# Altium PCB Grabber_DIOT.PCBDOC (part 1 of 7)
Units mm, origin at the board's own origin, x right, y up, seen from the top; angles counter-clockwise.
Board outline 221.14 x 100 mm, 4 copper layers (TopLayer, MidLayer1, Internal layer GND, Bottom Layer), stack 1.607 mm thick; 234 components, 170 nets, 1025 pads, 389 vias.
Unrouted connection lines stored in the file: 2.
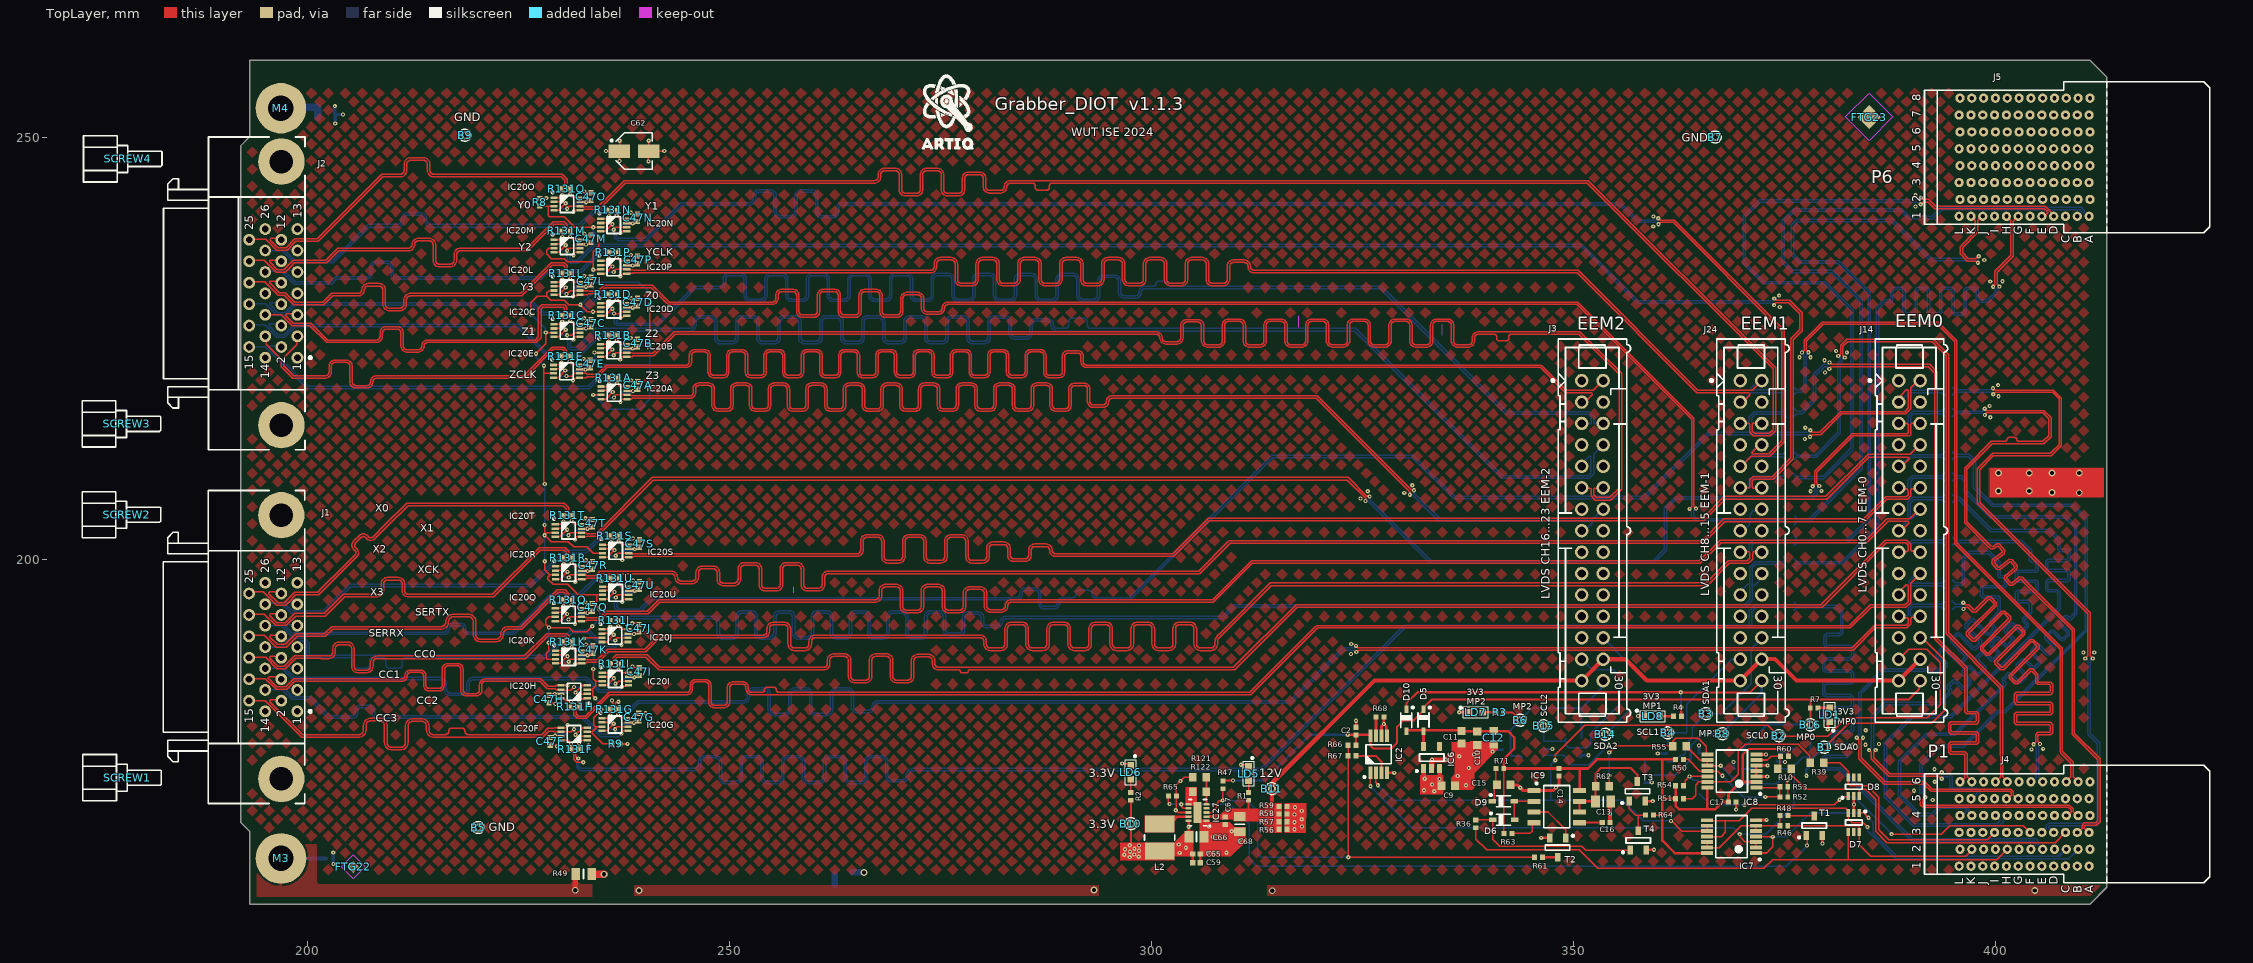
[diagram p0: TopLayer view]
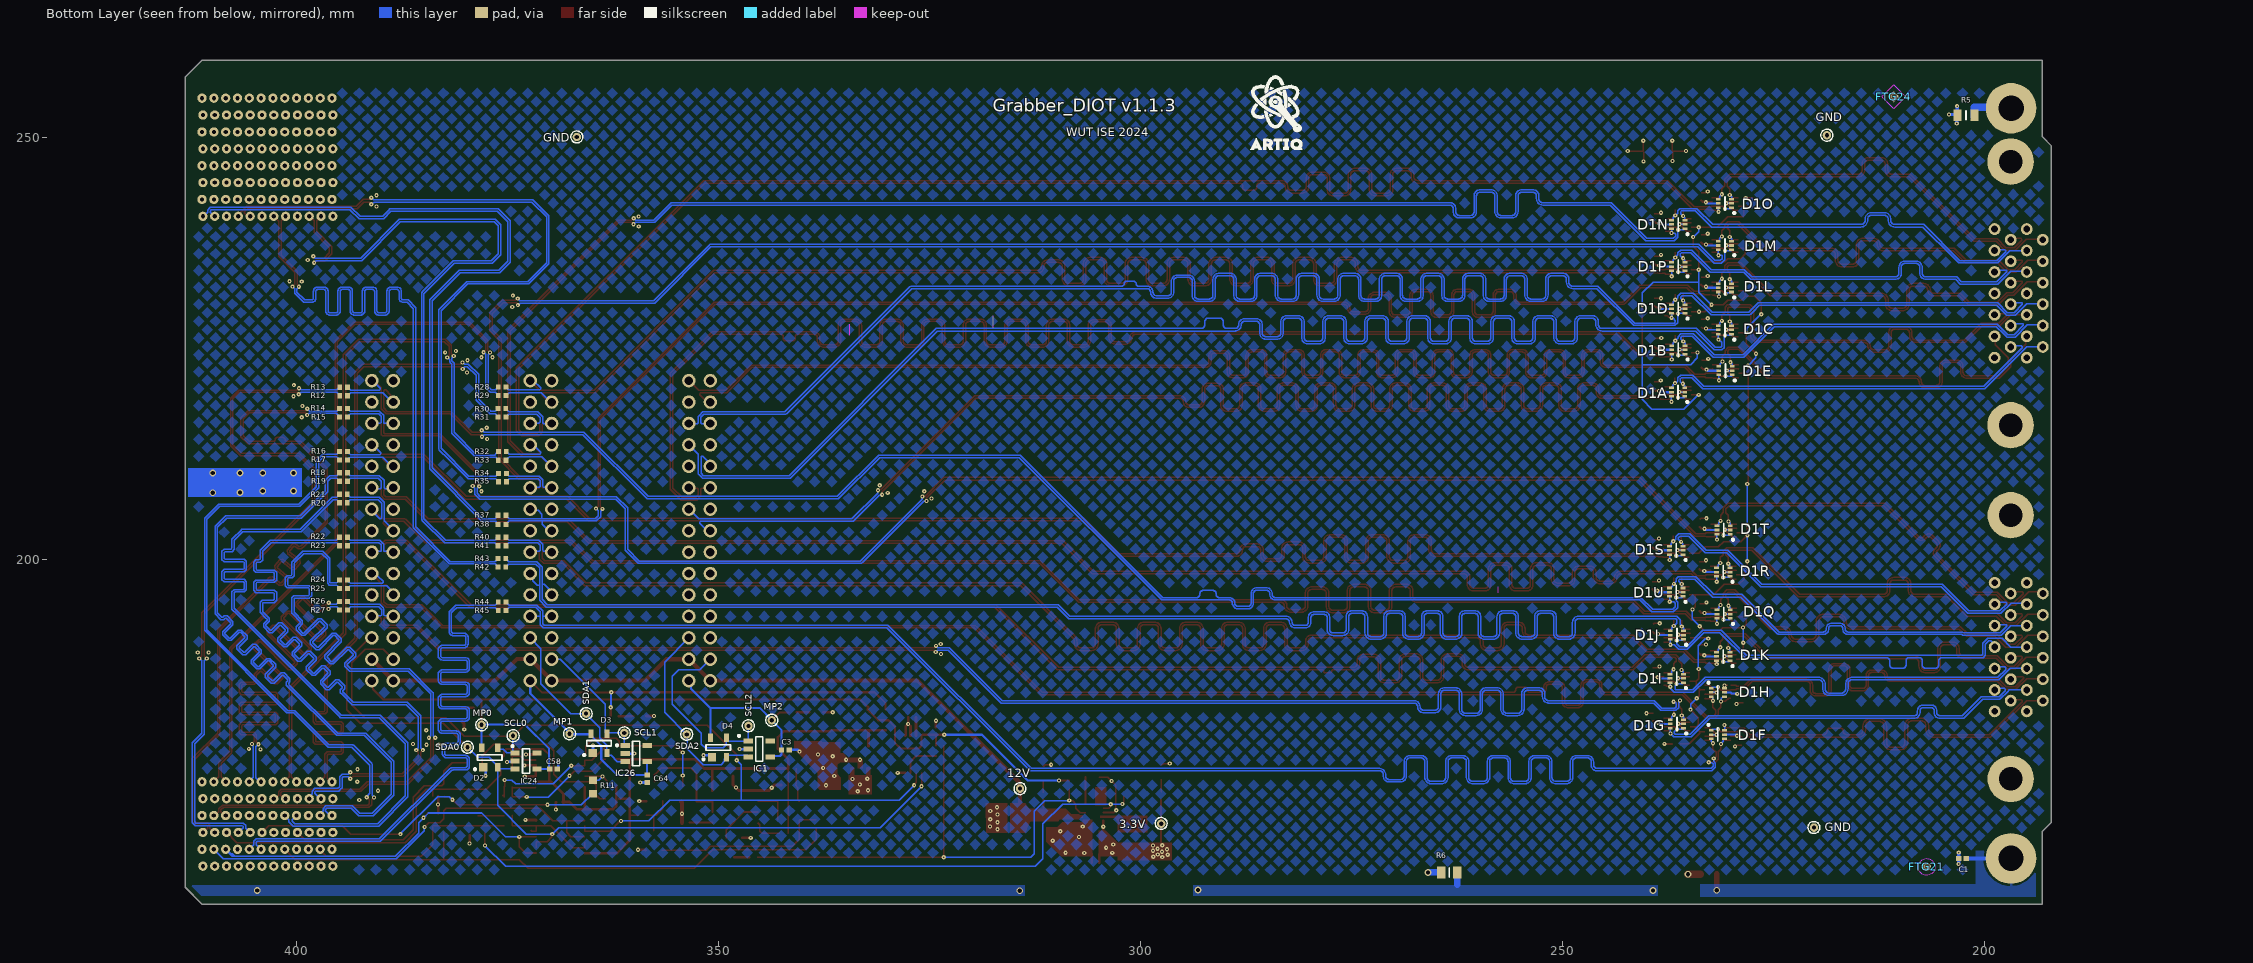
[diagram p1: Bottom Layer view, seen from below]
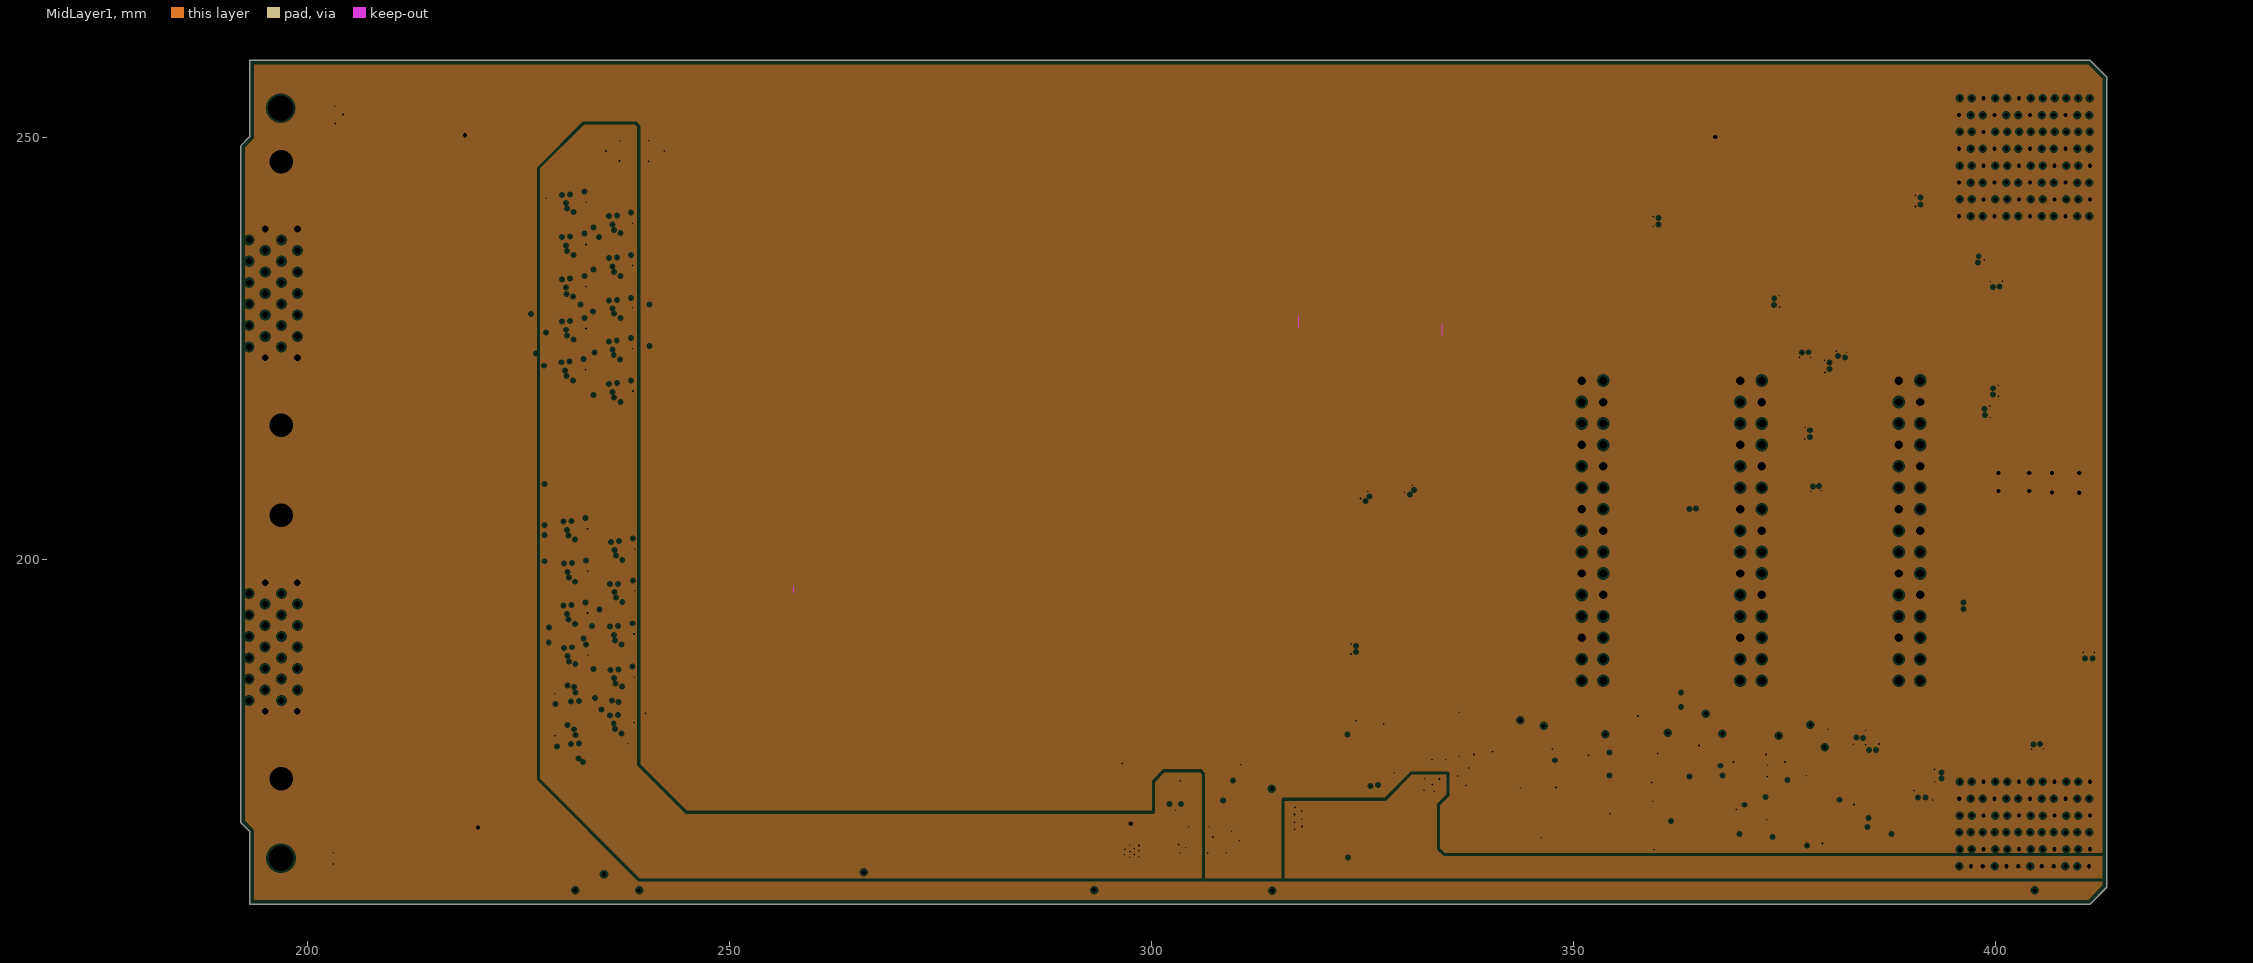
[diagram p2: MidLayer1, clearances drawn from the general rule]
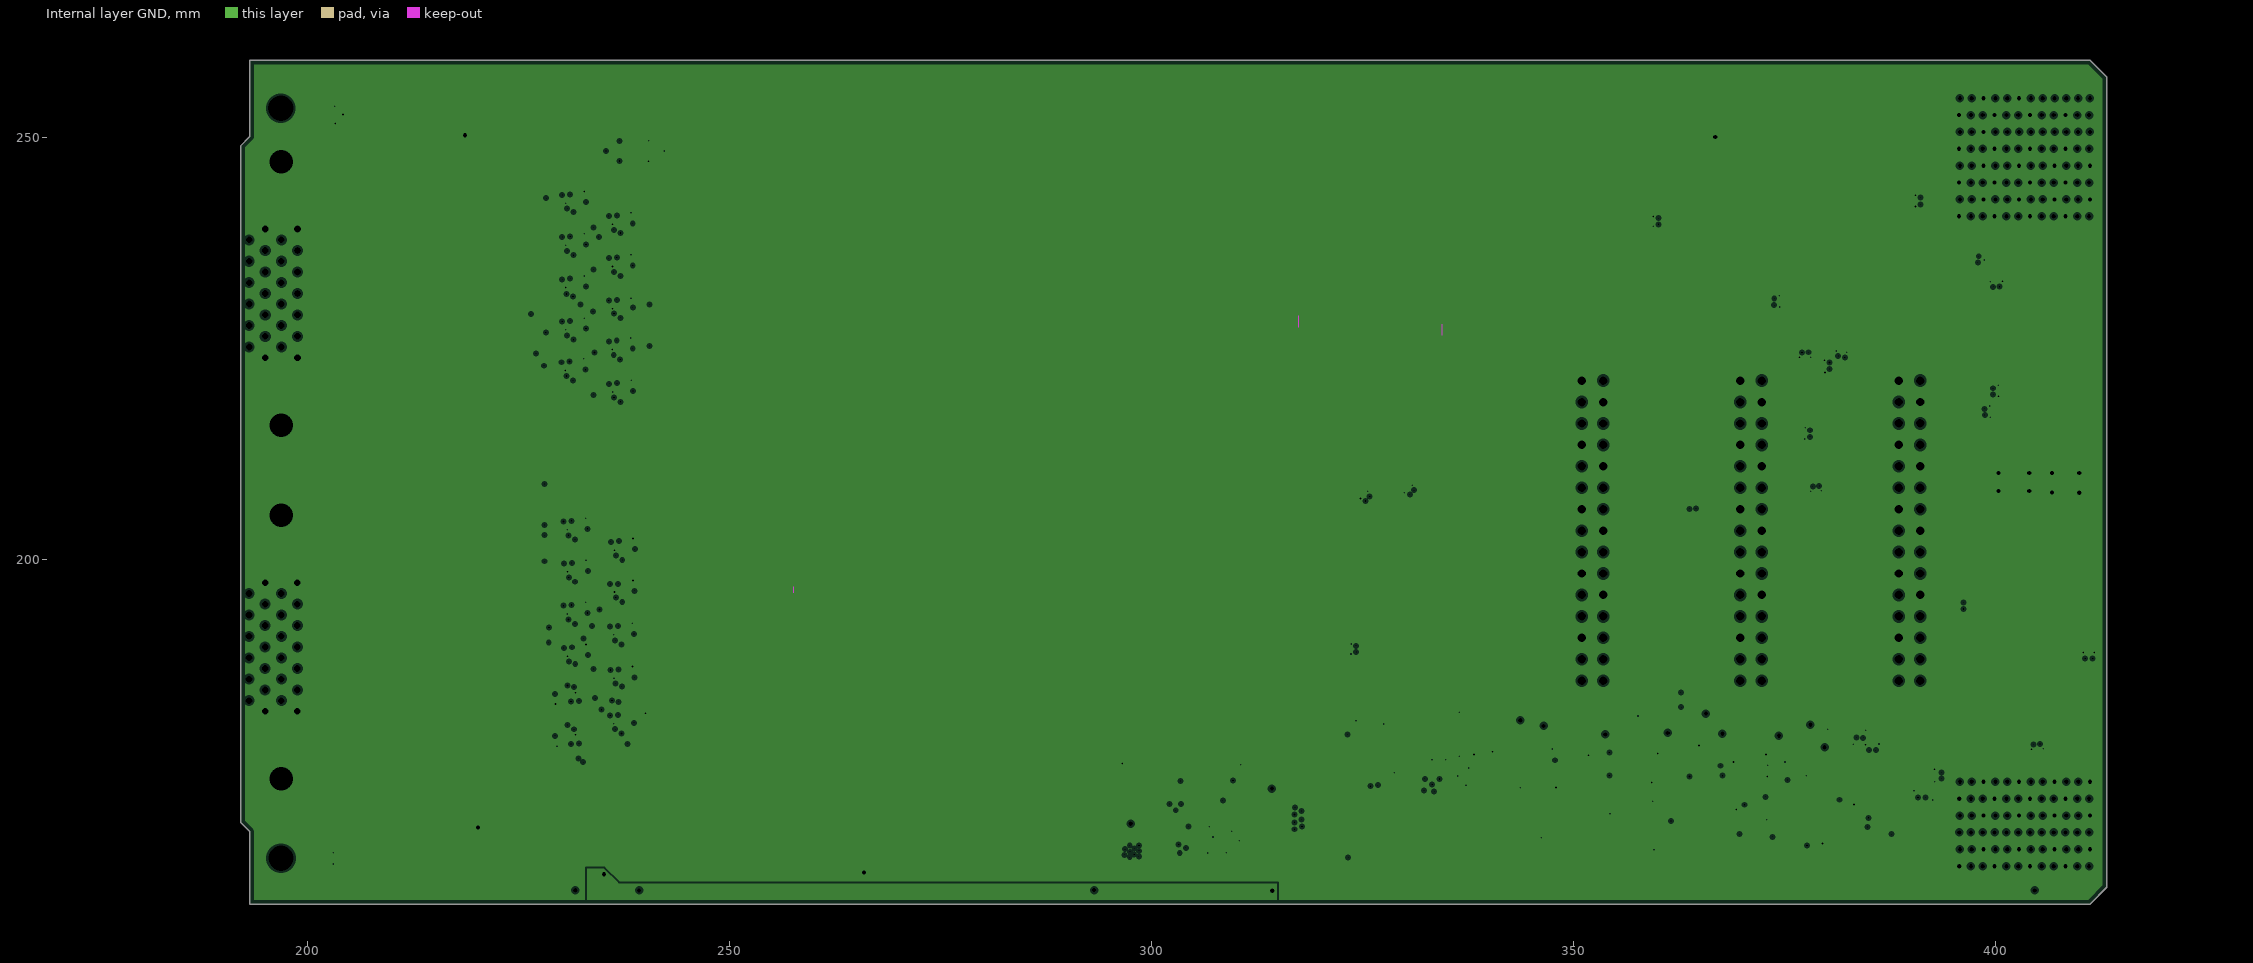
[diagram p3: Internal layer GND, clearances drawn from the general rule]

## Layer stack, top to bottom
TopSolder: solder mask 0.053, Solder Resist, Dk 3.5
TopLayer: signal copper 0.035
Dielectric1: core 0.3768, FR-4, Dk 4.5
MidLayer1: plane copper 0.035, net (Multiple Nets)
Dielectric 2: prepreg 0.713, FR-4, Dk 4.5
Internal layer GND: plane copper 0.035, net (Multiple Nets)
Dielectric 3: core 0.3768, FR-4, Dk 4.5
Bottom Layer: signal copper 0.035
Bottom Solder: solder mask 0.053, Solder Resist, Dk 3.5

## Board outline
192.092,168.856 193.192,167.756 193.192,159.157 411.231,159.156 413.231,161.156 413.231,257.157 411.231,259.156 193.293,259.156 193.192,259.156 193.192,250.107 192.092,249.007

## Design rules (kind name [scope] priority, off if disabled: settings)
AcuteAngle [All] p1: minimum=4.50000000000000E+0001 checktracksonly=FALSE
AssemblyTestPointUsage [All] p1 off:
AssemblyTestpoint [All] p1 off: testpointundercomponent=TRUE minsize=1.016 maxsize=2.54 preferedsize=1.524 minholesize=0 maxholesize=1.016 preferedholesize=0.813 testpointgrid=0.025 usegrid=TRUE gridtolerance=0 allowsidetop=TRUE allowsidebottom=TRUE
BoardOutlineClearance [All] p1: gap=0.4 ignorepadtopadclearanceinfootprint=FALSE
Clearance Clearance_diff_via [IsVia vs IsVia] p1: gap=0.107 ignorepadtopadclearanceinfootprint=FALSE
Clearance Clearance_outer [OnLayer('TopLayer') or OnLayer('Bottom Layer')] p2: gap=0.107 ignorepadtopadclearanceinfootprint=TRUE
Clearance Clearance_inner [(OnLayer('MidLayer1'))] p3: gap=0.107 ignorepadtopadclearanceinfootprint=FALSE
ComponentClearance ComponentClearance_2 [InComponent('SCREW1') or InComponent('SCREW2')or InComponent('SCREW3')or InComponent('SCREW4')] p1: gap=0 collisioncheckmode=3 verticalgap=2540 showdistances=FALSE
ComponentClearance ComponentClearance_1 [(Identifier = 'us251F809CB7zw3h')] p2: gap=0 collisioncheckmode=3 verticalgap=2540 showdistances=FALSE
ComponentClearance [All] p3: gap=0.254 collisioncheckmode=3 verticalgap=0.254 showdistances=FALSE
DiffPairsRouting DiffPairsRouting_100_Ohm [InDifferentialPairClass('All Differential Pairs')] p1: maxlimit=0.254 minlimit=0.127 mostfreqgap=0.152 toplayer_minwidth=0.127 toplayer_maxwidth=0.152 toplayer_prefwidth=0.152 bottomlayer_minwidth=0.127 bottomlayer_maxwidth=0.152 bottomlayer_prefwidth=0.152 maxuncoupledlength=14.732
FabricationTestPointUsage TestPointUsage [All] p1: valid=0 allowmultiple=FALSE
FabricationTestpoint Testpoint [All] p1: side=3 testpointundercomponent=TRUE minsize=1.016 maxsize=2.54 preferedsize=1.524 minholesize=0.508 maxholesize=1.016 preferedholesize=0.813 testpointgrid=0.025 allowsidetop=TRUE allowsidebottom=TRUE usegrid=TRUE gridtolerance=0
Height Height_1 [OnLayer('BottomLayer')] p1: minheight=0 maxheight=2 prefheight=1
Height [All] p2: minheight=0 maxheight=25.4 prefheight=12.7
HoleSize [All] p1: absolutevalues=TRUE maxlimit=3.2 minlimit=0.15 maxpercent=80.000 minpercent=20.000
HoleToHoleClearance [All] p1: gap=0.15 allowstackedmicrovias=TRUE
MatchedLengths MatchedLengths_xSignals_CL1 [InxSignalClass('CL_LVDS')] p1: tolerance=25.4 checknetsindiffpair=FALSE checkdiffpairvsdiffpair=TRUE checkxsignals=TRUE checkothers=TRUE usedelayunits=TRUE delaytolerance=10.000000
MatchedLengths MatchedLengths_xSignals_BP1 [InxSignalClass('BP_LVDS')] p2: tolerance=25.4 checknetsindiffpair=FALSE checkdiffpairvsdiffpair=TRUE checkxsignals=TRUE checkothers=TRUE usedelayunits=TRUE delaytolerance=10.000000
MatchedLengths MatchedLengths_xSignals_EEM1 [InxSignalClass('EEM_LVDS')] p3: tolerance=25.4 checknetsindiffpair=FALSE checkdiffpairvsdiffpair=TRUE checkxsignals=TRUE checkothers=TRUE usedelayunits=TRUE delaytolerance=10.000000
MatchedLengths MatchedLengths_xSignals2_CL2 [InxSignalClass('CL_LVDS')] p4: tolerance=25.4 checknetsindiffpair=TRUE checkdiffpairvsdiffpair=FALSE checkxsignals=FALSE checkothers=FALSE usedelayunits=TRUE delaytolerance=5.000000
MatchedLengths MatchedLengths_xSignals2_BP2 [InxSignalClass('BP_LVDS')] p5: tolerance=25.4 checknetsindiffpair=TRUE checkdiffpairvsdiffpair=FALSE checkxsignals=FALSE checkothers=FALSE usedelayunits=TRUE delaytolerance=5.000000
MatchedLengths MatchedLengths_xSignals2_EEM2 [InxSignalClass('EEM_LVDS')] p6: tolerance=25.4 checknetsindiffpair=TRUE checkdiffpairvsdiffpair=FALSE checkxsignals=FALSE checkothers=FALSE usedelayunits=TRUE delaytolerance=5.000000
MinimumSolderMaskSliver [All] p1: minsoldermaskwidth=0.1
ParallelSegment [All] p1 off: limit=5 gap=0.254
PlaneClearance [All] p1: clearance=0.254
PlaneConnect PlaneConnect_1 [HasCompParameterValue('PressFit', 'Yes')] p1: planeconnectstyle=Direct reliefexpansion=0.2 reliefentries=4 reliefconductorwidth=0.254 reliefairgap=0.254
PlaneConnect [All] p2: pad.planeconnectstyle=Relief pad.reliefexpansion=0.2 pad.reliefentries=4 pad.reliefconductorwidth=0.254 pad.reliefairgap=0.254 via.planeconnectstyle=Direct via.reliefexpansion=0.2 via.reliefentries=4 via.reliefconductorwidth=0.254 via.reliefairgap=0.15
PolygonConnect PolygonConnect_3 [HasFootprint('AMPHENOL_10052825-101LF')] p1: thpad.connectstyle=Direct thpad.reliefconductorwidth=0.254 thpad.reliefentries=4 thpad.polygonreliefangle="90 Angle" thpad.airgapwidth=0.254 smdpad.connectstyle=Relief smdpad.reliefconductorwidth=0.254 smdpad.reliefentries=4 smdpad.polygonreliefangle="90 Angle" smdpad.airgapwidth=0.254 via.connectstyle=Relief via.reliefconductorwidth=0.254 via.reliefentries=4 via.polygonreliefangle="90 Angle" via.airgapwidth=0.254
PolygonConnect PolygonConnect_1 [InPolygonClass('Direct')] p2: connectstyle=Direct reliefconductorwidth=0.254 reliefentries=2 polygonreliefangle="45 Angle" airgapwidth=0.254
PolygonConnect PolygonConnect_2 [InNetClass('PWR')] p3: thpad.connectstyle=Relief thpad.reliefconductorwidth=0.5 thpad.reliefentries=4 thpad.polygonreliefangle="90 Angle" thpad.airgapwidth=0.254 smdpad.connectstyle=Relief smdpad.reliefconductorwidth=0.5 smdpad.reliefentries=4 smdpad.polygonreliefangle="90 Angle" smdpad.airgapwidth=0.25 via.connectstyle=Direct via.reliefconductorwidth=0.254 via.reliefentries=2 via.polygonreliefangle="90 Angle" via.airgapwidth=0.254
PolygonConnect [All] p4: thpad.connectstyle=Relief thpad.reliefconductorwidth=0.254 thpad.reliefentries=4 thpad.polygonreliefangle="90 Angle" thpad.airgapwidth=0.254 smdpad.connectstyle=Relief smdpad.reliefconductorwidth=0.254 smdpad.reliefentries=4 smdpad.polygonreliefangle="90 Angle" smdpad.airgapwidth=0.254 via.connectstyle=Direct via.reliefconductorwidth=0.254 via.reliefentries=4 via.polygonreliefangle="90 Angle" via.airgapwidth=0.254
RoutingLayers RoutingLayers_1 [InAnyDifferentialPair] p1: top layer_v5=TRUE bottom layer_v5=TRUE
RoutingLayers RoutingLayers_2 [InNetClass('50Ohm')] p2: top layer_v5=TRUE bottom layer_v5=TRUE
RoutingLayers [All] p3: top layer_v5=TRUE bottom layer_v5=TRUE
RoutingVias [All] p1: holewidth=0.2 width=0.5 viastyle="Through Hole" minholewidth=0.2 minwidth=0.5 maxholewidth=0.508 maxwidth=1.016
SMDEntry [All] p1 off: side=TRUE corner=TRUE anyangle=FALSE
SilkToSilkClearance [All] p1: silktosilkclearance=0.15
SilkToSolderMaskClearance SilkscreenOverComponentPads [IsPad] p1: minsilkscreentomaskgap=0.025 clearancetoexposedcopper=FALSE
SolderMaskExpansion SolderMaskExpansion_1 [IsVia] p1: expansion=0.05 istentingtop=TRUE
SolderMaskExpansion [All] p2: expansion=0.05 istentingtop=FALSE
StubLength [All] p1: limit=3
SupplyNets "Schematic Supply Nets_9" [InNet('P3V3_CPCIS')] p1: voltage=0.000
SupplyNets "Schematic Supply Nets_8" [InNet('STRIP1')] p2: voltage=0.000
SupplyNets "Schematic Supply Nets_7" [InNet('P12V0_CPCIS')] p3: voltage=0.000
SupplyNets "Schematic Supply Nets_6" [InNet('GND')] p4: voltage=0.000
SupplyNets "Schematic Supply Nets_5" [InNet('P3V3_MP0')] p5: voltage=0.000
SupplyNets "Schematic Supply Nets_4" [InNet('P3V3')] p6: voltage=0.000
SupplyNets "Schematic Supply Nets_3" [InNet('P3V3_MP1')] p7: voltage=0.000
SupplyNets "Schematic Supply Nets_1" [InNet('P12V0')] p8: voltage=0.000
SupplyNets "Schematic Supply Nets" [InNet('P3V3_MP2')] p9: voltage=0.000
UnConnectedPin [All] p1 off:
UnRoutedNet UnRoutedNet_1 [Not InNet('STRIP1')] p2:
UnpouredPolygon UnpouredPolygon_1 [InPolygonClass('Copper_Balancing')] p1: allowunpoured=TRUE
UnpouredPolygon [All] p2:
ViasUnderSMD [All] p1: allowed=TRUE
Width Width_pwr [InNetClass('PWR')] p1: maxlimit=2 minlimit=0.152 preferedwidth=0.3 minimp=50.000000 maximp=50.000000 favimp=50.000000
Width Width_50Ohm [InNetClass('50Ohm')] p2: maxlimit=0.167 minlimit=0.167 preferedwidth=0.167 minimp=50.000000 maximp=50.000000 favimp=50.000000
Width [All] p3: maxlimit=2 minlimit=0.152 preferedwidth=0.152 minimp=50.000000 maximp=50.000000 favimp=50.000000
14 further rules are at their usual default settings.

## Classes and differential pairs
component class U_Supply: C2 C9 C10 C11 C59 C62 C65 C66 C67 C68 D5 D10 IC2 IC6 IC27 L2 R47 R56 R57 R58 R59 R65 R66 R67 R68 R121 R122
net class ESD_STRIP: STRIP1 STRIP2 STRIP3
component class Grabber_DIOT_TOP: C1 M3 M4 R5 R6 R49
net class BP_LVDS: BP_IO.LVDS_N0 BP_IO.LVDS_N1 BP_IO.LVDS_N2 BP_IO.LVDS_N3 BP_IO.LVDS_N4 BP_IO.LVDS_N5 BP_IO.LVDS_N6 BP_IO.LVDS_N7 BP_IO.LVDS_N8 BP_IO.LVDS_N9 BP_IO.LVDS_N10 BP_IO.LVDS_N11 BP_IO.LVDS_N12 BP_IO.LVDS_N13 BP_IO.LVDS_N14 BP_IO.LVDS_N15 BP_IO.LVDS_P0 BP_IO.LVDS_P1 BP_IO.LVDS_P2 BP_IO.LVDS_P3 BP_IO.LVDS_P4 BP_IO.LVDS_P5 BP_IO.LVDS_P6 BP_IO.LVDS_P7 BP_IO.LVDS_P8 BP_IO.LVDS_P9 BP_IO.LVDS_P10 BP_IO.LVDS_P11 BP_IO.LVDS_P12 BP_IO.LVDS_P13 BP_IO.LVDS_P14 BP_IO.LVDS_P15
differential pair class Diff_100Ohm: BP_IO.LVDS0 BP_IO.LVDS1 BP_IO.LVDS2 BP_IO.LVDS3 BP_IO.LVDS4 BP_IO.LVDS5 BP_IO.LVDS6 BP_IO.LVDS7 BP_IO.LVDS8 BP_IO.LVDS9 BP_IO.LVDS10 BP_IO.LVDS11 BP_IO.LVDS12 BP_IO.LVDS13 BP_IO.LVDS14 BP_IO.LVDS15 EEM_IO.LVDS0 EEM_IO.LVDS1 EEM_IO.LVDS2 EEM_IO.LVDS3 EEM_IO.LVDS4 EEM_IO.LVDS5 EEM_IO.LVDS6 EEM_IO.LVDS7 EEM_IO.LVDS8 EEM_IO.LVDS9 EEM_IO.LVDS10 EEM_IO.LVDS11 EEM_IO.LVDS12 EEM_IO.LVDS13 EEM_IO.LVDS14 EEM_IO.LVDS15 EEM_IO.LVDS16 EEM_IO.LVDS17 EEM_IO.LVDS18 EEM_IO.LVDS19 EEM_IO.LVDS20
net class PWR: P12V0_CPCIS
net class EEM_IO.LVDS_P[0..20]: EEM_IO.LVDS_P0 EEM_IO.LVDS_P1 EEM_IO.LVDS_P2 EEM_IO.LVDS_P3 EEM_IO.LVDS_P4 EEM_IO.LVDS_P5 EEM_IO.LVDS_P6 EEM_IO.LVDS_P7 EEM_IO.LVDS_P8 EEM_IO.LVDS_P9 EEM_IO.LVDS_P10 EEM_IO.LVDS_P11 EEM_IO.LVDS_P12 EEM_IO.LVDS_P13 EEM_IO.LVDS_P14 EEM_IO.LVDS_P15 EEM_IO.LVDS_P16 EEM_IO.LVDS_P17 EEM_IO.LVDS_P18 EEM_IO.LVDS_P19 EEM_IO.LVDS_P20
net class EEM_IO.LVDS_N[0..20]: EEM_IO.LVDS_N0 EEM_IO.LVDS_N1 EEM_IO.LVDS_N2 EEM_IO.LVDS_N3 EEM_IO.LVDS_N4 EEM_IO.LVDS_N5 EEM_IO.LVDS_N6 EEM_IO.LVDS_N7 EEM_IO.LVDS_N8 EEM_IO.LVDS_N9 EEM_IO.LVDS_N10 EEM_IO.LVDS_N11 EEM_IO.LVDS_N12 EEM_IO.LVDS_N13 EEM_IO.LVDS_N14 EEM_IO.LVDS_N15 EEM_IO.LVDS_N16 EEM_IO.LVDS_N17 EEM_IO.LVDS_N18 EEM_IO.LVDS_N19 EEM_IO.LVDS_N20
net class BP_IO.LVDS_P[0..15]: BP_IO.LVDS_P0 BP_IO.LVDS_P1 BP_IO.LVDS_P2 BP_IO.LVDS_P3 BP_IO.LVDS_P4 BP_IO.LVDS_P5 BP_IO.LVDS_P6 BP_IO.LVDS_P7 BP_IO.LVDS_P8 BP_IO.LVDS_P9 BP_IO.LVDS_P10 BP_IO.LVDS_P11 BP_IO.LVDS_P12 BP_IO.LVDS_P13 BP_IO.LVDS_P14 BP_IO.LVDS_P15
net class BP_IO.LVDS_N[0..15]: BP_IO.LVDS_N0 BP_IO.LVDS_N1 BP_IO.LVDS_N2 BP_IO.LVDS_N3 BP_IO.LVDS_N4 BP_IO.LVDS_N5 BP_IO.LVDS_N6 BP_IO.LVDS_N7 BP_IO.LVDS_N8 BP_IO.LVDS_N9 BP_IO.LVDS_N10 BP_IO.LVDS_N11 BP_IO.LVDS_N12 BP_IO.LVDS_N13 BP_IO.LVDS_N14 BP_IO.LVDS_N15
component class U_EEM_Connectors: C12 IC7 J3 J14 J24 R12 R13 R14 R15 R16 R17 R18 R19 R20 R21 R22 R23 R24 R25 R26 R27 R28 R29 R30 R31 R32 R33 R34 R35 R37 R38 R40 R41 R42 R43 R44 R45
component class U_CPCIS_Connectors: C13 C14 C15 C16 C17 D6 D7 D8 D9 IC8 IC9 J4 J5 P1 R10 R11 R36 R39 R46 R48 R50 R51 R52 R53 R54 R55 R60 R61 R62 R63 R64 R71 T1 T2 T3 T4
net class EEM_LVDS: EEM_IO.LVDS_N0 EEM_IO.LVDS_N1 EEM_IO.LVDS_N2 EEM_IO.LVDS_N3 EEM_IO.LVDS_N4 EEM_IO.LVDS_N5 EEM_IO.LVDS_N6 EEM_IO.LVDS_N7 EEM_IO.LVDS_N8 EEM_IO.LVDS_N9 EEM_IO.LVDS_N10 EEM_IO.LVDS_N11 EEM_IO.LVDS_N12 EEM_IO.LVDS_N13 EEM_IO.LVDS_N14 EEM_IO.LVDS_N15 EEM_IO.LVDS_N16 EEM_IO.LVDS_N17 EEM_IO.LVDS_N18 EEM_IO.LVDS_N19 EEM_IO.LVDS_N20 EEM_IO.LVDS_P0 EEM_IO.LVDS_P1 EEM_IO.LVDS_P2 EEM_IO.LVDS_P3 EEM_IO.LVDS_P4 EEM_IO.LVDS_P5 EEM_IO.LVDS_P6 EEM_IO.LVDS_P7 EEM_IO.LVDS_P8 EEM_IO.LVDS_P9 EEM_IO.LVDS_P10 EEM_IO.LVDS_P11 EEM_IO.LVDS_P12 EEM_IO.LVDS_P13 EEM_IO.LVDS_P14 EEM_IO.LVDS_P15 EEM_IO.LVDS_P16 EEM_IO.LVDS_P17 EEM_IO.LVDS_P18 EEM_IO.LVDS_P19 EEM_IO.LVDS_P20
net class CL_LVDS: CC0_N CC0_P CC1_N CC1_P CC2_N CC2_P CC3_N CC3_P SerRX_N SerRX_P SerTX_N SerTX_P X0_N X0_P X1_N X1_P X2_N X2_P X3_N X3_P XCLK_N XCLK_P Y0_N Y0_P Y1_N Y1_P Y2_N Y2_P Y3_N Y3_P YCLK_N YCLK_P Z0_N Z0_P Z1_N Z1_P Z2_N Z2_P Z3_N Z3_P ZCLK_N ZCLK_P
component class U_LVDS_repeater2: C47B D1B IC20B R131B
component class U_LVDS_repeater21: C47U D1U IC20U R131U
component class U_LVDS_repeater20: C47T D1T IC20T R131T
component class U_LVDS_repeater19: C47S D1S IC20S R131S
component class U_LVDS_repeater18: C47R D1R IC20R R131R
component class U_LVDS_repeater17: C47Q D1Q IC20Q R131Q
channel class LVDS_repeater: U_LVDS_repeater1 U_LVDS_repeater2 U_LVDS_repeater3 U_LVDS_repeater4 U_LVDS_repeater5 U_LVDS_repeater6 U_LVDS_repeater7 U_LVDS_repeater8 U_LVDS_repeater9 U_LVDS_repeater10 U_LVDS_repeater11 U_LVDS_repeater12 U_LVDS_repeater13 U_LVDS_repeater14 U_LVDS_repeater15 U_LVDS_repeater16 U_LVDS_repeater17 U_LVDS_repeater18 U_LVDS_repeater19 U_LVDS_repeater20 U_LVDS_repeater21
component class U_LVDS_repeater10: C46J C47J D1J IC19J IC20J R131J R132J R133J T25J
component class U_LVDS_repeater9: C46I C47I D1I IC19I IC20I R131I R132I R133I T25I
component class U_LVDS_repeater8: C46H C47H D1H IC19H IC20H R131H R132H R133H T25H
component class U_LVDS_repeater6: C46F C47F D1F IC19F IC20F R131F R132F R133F T25F
component class U_LVDS_repeater5: C46E C47E D1E IC19E IC20E R131E R132E R133E T25E
component class U_LVDS_repeater4: C46D C47D D1D IC19D IC20D R131D R132D R133D T25D
component class U_LVDS_repeater3: C47C D1C IC20C R131C
component class U_LVDS_repeater7: C47G D1G IC20G R131G
component class U_LVDS_repeater1: C47A D1A IC20A R131A
component class U_Grabber_DIOT: B1 B2 B3 B4 B5 B6 B7 B8 B9 B10 B11 B14 B15 B16 C3 C58 C64 D2 D3 D4 FTG21 FTG22 FTG23 FTG24 IC1 IC24 IC26 J1 J2 LD1 LD5 LD6 LD7 LD8 R1 R2 R3 R4 R7 R8 R9 SCREW1 SCREW2 SCREW3 SCREW4
component class U_LVDS_repeater11: C47K D1K IC20K R131K
component class U_LVDS_repeater12: C47L D1L IC20L R131L
component class U_LVDS_repeater13: C47M D1M IC20M R131M
component class U_LVDS_repeater14: C47N D1N IC20N R131N
component class U_LVDS_repeater15: C47O D1O IC20O R131O
component class U_LVDS_repeater16: C47P D1P IC20P R131P
differential pair EEM_IO.LVDS20: +EEM_IO.LVDS_P20 -EEM_IO.LVDS_N20
differential pair EEM_IO.LVDS19: +EEM_IO.LVDS_P19 -EEM_IO.LVDS_N19
differential pair EEM_IO.LVDS18: +EEM_IO.LVDS_P18 -EEM_IO.LVDS_N18
differential pair EEM_IO.LVDS17: +EEM_IO.LVDS_P17 -EEM_IO.LVDS_N17
differential pair EEM_IO.LVDS16: +EEM_IO.LVDS_P16 -EEM_IO.LVDS_N16
differential pair EEM_IO.LVDS15: +EEM_IO.LVDS_P15 -EEM_IO.LVDS_N15
differential pair EEM_IO.LVDS14: +EEM_IO.LVDS_P14 -EEM_IO.LVDS_N14
differential pair EEM_IO.LVDS13: +EEM_IO.LVDS_P13 -EEM_IO.LVDS_N13
differential pair EEM_IO.LVDS12: +EEM_IO.LVDS_P12 -EEM_IO.LVDS_N12
differential pair EEM_IO.LVDS11: +EEM_IO.LVDS_P11 -EEM_IO.LVDS_N11
differential pair EEM_IO.LVDS10: +EEM_IO.LVDS_P10 -EEM_IO.LVDS_N10
differential pair EEM_IO.LVDS9: +EEM_IO.LVDS_P9 -EEM_IO.LVDS_N9
differential pair EEM_IO.LVDS8: +EEM_IO.LVDS_P8 -EEM_IO.LVDS_N8
differential pair EEM_IO.LVDS7: +EEM_IO.LVDS_P7 -EEM_IO.LVDS_N7
differential pair EEM_IO.LVDS6: +EEM_IO.LVDS_P6 -EEM_IO.LVDS_N6
differential pair EEM_IO.LVDS5: +EEM_IO.LVDS_P5 -EEM_IO.LVDS_N5
differential pair EEM_IO.LVDS4: +EEM_IO.LVDS_P4 -EEM_IO.LVDS_N4
differential pair EEM_IO.LVDS3: +EEM_IO.LVDS_P3 -EEM_IO.LVDS_N3
differential pair EEM_IO.LVDS2: +EEM_IO.LVDS_P2 -EEM_IO.LVDS_N2
differential pair EEM_IO.LVDS1: +EEM_IO.LVDS_P1 -EEM_IO.LVDS_N1
differential pair EEM_IO.LVDS0: +EEM_IO.LVDS_P0 -EEM_IO.LVDS_N0
differential pair BP_IO.LVDS15: +BP_IO.LVDS_P15 -BP_IO.LVDS_N15
differential pair BP_IO.LVDS14: +BP_IO.LVDS_P14 -BP_IO.LVDS_N14
differential pair BP_IO.LVDS13: +BP_IO.LVDS_P13 -BP_IO.LVDS_N13
differential pair BP_IO.LVDS12: +BP_IO.LVDS_P12 -BP_IO.LVDS_N12
differential pair BP_IO.LVDS11: +BP_IO.LVDS_P11 -BP_IO.LVDS_N11
differential pair BP_IO.LVDS10: +BP_IO.LVDS_P10 -BP_IO.LVDS_N10
differential pair BP_IO.LVDS9: +BP_IO.LVDS_P9 -BP_IO.LVDS_N9
differential pair BP_IO.LVDS8: +BP_IO.LVDS_P8 -BP_IO.LVDS_N8
differential pair BP_IO.LVDS7: +BP_IO.LVDS_P7 -BP_IO.LVDS_N7
differential pair BP_IO.LVDS6: +BP_IO.LVDS_P6 -BP_IO.LVDS_N6
differential pair BP_IO.LVDS5: +BP_IO.LVDS_P5 -BP_IO.LVDS_N5
differential pair BP_IO.LVDS4: +BP_IO.LVDS_P4 -BP_IO.LVDS_N4
differential pair BP_IO.LVDS3: +BP_IO.LVDS_P3 -BP_IO.LVDS_N3
differential pair BP_IO.LVDS2: +BP_IO.LVDS_P2 -BP_IO.LVDS_N2
differential pair BP_IO.LVDS1: +BP_IO.LVDS_P1 -BP_IO.LVDS_N1
differential pair BP_IO.LVDS0: +BP_IO.LVDS_P0 -BP_IO.LVDS_N0
differential pair ZCLK: +ZCLK_P -ZCLK_N
differential pair Z3: +Z3_P -Z3_N
differential pair Z2: +Z2_P -Z2_N
differential pair Z1: +Z1_P -Z1_N
differential pair Z0: +Z0_P -Z0_N
differential pair YCLK: +YCLK_P -YCLK_N
differential pair Y3: +Y3_P -Y3_N
differential pair Y2: +Y2_P -Y2_N
differential pair Y1: +Y1_P -Y1_N
differential pair Y0: +Y0_P -Y0_N
differential pair XCLK: +XCLK_P -XCLK_N
differential pair X3: +X3_P -X3_N
differential pair X2: +X2_P -X2_N
differential pair X1: +X1_P -X1_N
differential pair X0: +X0_P -X0_N
differential pair SERTX: +SERTX_P -SERTX_N
differential pair SERRX: +SERRX_P -SERRX_N
differential pair CC0: +CC0_P -CC0_N
differential pair CC1: +CC1_P -CC1_N
differential pair CC2: +CC2_P -CC2_N
differential pair CC3: +CC3_P -CC3_N

## Components (designator, comment, footprint, x,y, rotation, side; value= is the part's Value field where it differs from the comment)
B1 "Plated Hole" c100h50 379.782,177.757 r90 top
B2 "Plated Hole" c100h50 374.383,179.111 r90 top
B3 "Plated Hole" c100h50 365.721,181.731 r90 top
B4 "Plated Hole" c100h50 361.199,179.444 r90 top
B5 "Plated Hole" c100h50 220.231,168.229 r0 top
B6 "Plated Hole" c100h50 343.725,180.946 r0 top
B7 "Plated Hole" c100h50 366.822,250.055 r0 top
B8 "Plated Hole" c100h50 367.689,179.341 r0 top
B9 "Plated Hole" c100h50 218.704,250.259 r0 top
B10 "Plated Hole" c100h50 297.585,168.682 r90 top
B11 "Plated Hole" c100h50 314.311,172.847 r0 top
B14 "Plated Hole" c100h50 353.806,179.275 r0 top
B15 "Plated Hole" c100h50 346.483,180.279 r0 top
B16 "Plated Hole" c100h50 378.111,180.405 r0 top
C1 "22pF" CAPC1005X55N 202.637,164.579 r0 bottom
C2 "100nF" CAPC1005X55N 324.273,179.661 r270 top
C3 "100nF" CAPC1005X55N 342.106,177.433 r0 bottom
C9 "1uF" CAPC1608X87N 335.182,173.207 r180 top
C10 "1uF" CAPC1608X87N 338.657,178.832 r90 top
C11 "22uF" CAPC1608X90N 336.777,178.922 r90 top
C12 "100nF" CAPC1608X87N 340.582,178.857 r90 top
C13 "22uF" CAPC2012X135N 353.557,171.307 r180 top
C14 "100nF" CAPC1005X55N 348.333,174.78 r90 top
C15 "1uF" CAPC1608X87N 341.758,173.281 r180 top
C16 "100nF" CAPC1005X55N 353.907,168.832 r180 top
C17 "100nF" CAPC1005X55N 368.857,171.257 r180 top
C47A "100nF" CAPC1005X55N 239.166,220.618 r270 top (schematic designator C47)
C47B "100nF" CAPC1005X55N 239.131,225.642 r270 top (schematic designator C47)
C47C "100nF" CAPC1005X55N 233.606,227.992 r270 top (schematic designator C47)
C47D "100nF" CAPC1005X55N 239.141,230.492 r270 top (schematic designator C47)
C47E "100nF" CAPC1005X55N 233.541,223.167 r270 top (schematic designator C47)
C47F "100nF" CAPC1005X55N 228.799,178.449 r90 top (schematic designator C47)
C47G "100nF" CAPC1005X55N 239.291,181.317 r270 top (schematic designator C47)
C47H "100nF" CAPC1005X55N 228.643,183.464 r90 top (schematic designator C47)
C47I "100nF" CAPC1005X55N 239.326,186.71 r270 top (schematic designator C47)
C47J "100nF" CAPC1005X55N 239.298,191.843 r270 top (schematic designator C47)
C47K "100nF" CAPC1005X55N 233.845,189.322 r270 top (schematic designator C47)
C47L "100nF" CAPC1005X55N 233.606,232.992 r270 top (schematic designator C47)
C47M "100nF" CAPC1005X55N 233.606,237.999 r270 top (schematic designator C47)
C47N "100nF" CAPC1005X55N 239.141,240.492 r270 top (schematic designator C47)
C47O "100nF" CAPC1005X55N 233.606,242.992 r270 top (schematic designator C47)
C47P "100nF" CAPC1005X55N 239.141,235.492 r270 top (schematic designator C47)
C47Q "100nF" CAPC1005X55N 233.766,194.317 r270 top (schematic designator C47)
C47R "100nF" CAPC1005X55N 233.801,199.3 r270 top (schematic designator C47)
C47S "100nF" CAPC1005X55N 239.376,201.883 r270 top (schematic designator C47)
C47T "100nF" CAPC1005X55N 233.766,204.291 r270 top (schematic designator C47)
C47U "100nF" CAPC1005X55N 239.376,196.917 r270 top (schematic designator C47)
C58 "100nF" CAPC1005X55N 369.582,175.182 r0 bottom
C59 "100nF" CAPC1005X55N 305.371,164.051 r180 top
C62 "10uF" CAPAE430X540N 238.737,248.392 r0 top
C64 "100nF" CAPC1005X55N 358.492,174.02 r90 bottom
C65 "100nF" CAPC1005X55N 305.371,165.115 r180 top
C66 "22uF" CAPC2012X135N 305.371,167.133 r180 top
C67 "100nF" CAPC1005X55N 308.782,169.032 r90 top
C68 "22uF" CAPC2012X135N 310.482,168.632 r90 top
D1A "NUP4114UPXV6T1G" SOTFL50P160X60-6N 236.341,219.818 r0 bottom (schematic designator D1)
D1B "NUP4114UPXV6T1G" SOTFL50P160X60-6N 236.306,224.842 r0 bottom (schematic designator D1)
D1C "NUP4114UPXV6T1G" SOTFL50P160X60-6N 230.781,227.192 r0 bottom (schematic designator D1)
D1D "NUP4114UPXV6T1G" SOTFL50P160X60-6N 236.316,229.692 r0 bottom (schematic designator D1)
D1E "NUP4114UPXV6T1G" SOTFL50P160X60-6N 230.716,222.367 r0 bottom (schematic designator D1)
D1F "NUP4114UPXV6T1G" SOTFL50P160X60-6N 231.624,179.249 r180 bottom (schematic designator D1)
D1G "NUP4114UPXV6T1G" SOTFL50P160X60-6N 236.466,180.517 r0 bottom (schematic designator D1)
D1H "NUP4114UPXV6T1G" SOTFL50P160X60-6N 231.624,184.249 r180 bottom (schematic designator D1)
D1I "NUP4114UPXV6T1G" SOTFL50P160X60-6N 236.501,185.91 r0 bottom (schematic designator D1)
D1J "NUP4114UPXV6T1G" SOTFL50P160X60-6N 236.473,191.043 r0 bottom (schematic designator D1)
D1K "NUP4114UPXV6T1G" SOTFL50P160X60-6N 230.976,188.518 r0 bottom (schematic designator D1)
D1L "NUP4114UPXV6T1G" SOTFL50P160X60-6N 230.781,232.192 r0 bottom (schematic designator D1)
D1M "NUP4114UPXV6T1G" SOTFL50P160X60-6N 230.781,237.199 r0 bottom (schematic designator D1)
D1N "NUP4114UPXV6T1G" SOTFL50P160X60-6N 236.316,239.692 r0 bottom (schematic designator D1)
D1O "NUP4114UPXV6T1G" SOTFL50P160X60-6N 230.781,242.192 r0 bottom (schematic designator D1)
D1P "NUP4114UPXV6T1G" SOTFL50P160X60-6N 236.316,234.692 r0 bottom (schematic designator D1)
D1Q "NUP4114UPXV6T1G" SOTFL50P160X60-6N 230.941,193.517 r0 bottom (schematic designator D1)
D1R "NUP4114UPXV6T1G" SOTFL50P160X60-6N 230.976,198.5 r0 bottom (schematic designator D1)
D1S "NUP4114UPXV6T1G" SOTFL50P160X60-6N 236.551,201.083 r0 bottom (schematic designator D1)
D1T "NUP4114UPXV6T1G" SOTFL50P160X60-6N 230.941,203.491 r0 bottom (schematic designator D1)
D1U "NUP4114UPXV6T1G" SOTFL50P160X60-6N 236.551,196.117 r0 bottom (schematic designator D1)
D2 "PRTR5V0U2X" SOT190P230X110-4N 377.142,176.545 r90 bottom
D3 "PRTR5V0U2X" SOT190P230X110-4N 364.206,178.217 r90 bottom
D4 "PRTR5V0U2X" SOT190P230X110-4N 350.057,177.708 r90 bottom
D5 "BAT165" SOD2512X110N 332.258,180.965 r270 top
D6 "BAT165" SOD2512X110N 341.758,169.156 r0 top
D7 "PESD3V3L5UY" SOT65P210X110-6N 383.257,168.832 r270 top
D8 "PESD3V3L5UY" SOT65P210X110-6N 383.257,173.057 r90 top
D9 "BAT165" SOD2512X110N 341.733,171.349 r0 top
D10 "BAT165" SOD2512X110N 330.234,180.946 r270 top
FTG21 "Use only in PCB" FIDUCIAL_TOP_C100-200 206.878,163.571 r90 bottom
FTG22 "Use only in PCB" FIDUCIAL_TOP_S100-200 205.464,163.571 r90 top
FTG23 "Use only in PCB" FIDUCIAL_TOP_S200-400 385.064,252.425 r0 top
FTG24 "Use only in PCB" FIDUCIAL_TOP_S100-200 210.769,254.838 r90 bottom
IC1 "24AA02E48T-I/OT" SOT95P280X145-5N 345.207,177.531 r180 bottom
IC2 "LM75AIMM/NOPB" SOP65P490X109-8N 326.957,176.907 r90 top
IC6 "MIC5219-3.3YM5" SOT95P280X145-5N 333.232,176.532 r90 top
IC7 "74HC4066PW" SOP65P640X110-14N 368.757,167.157 r180 top
IC8 "74HC4066PW" SOP65P640X110-14N 368.807,174.932 r180 top
IC9 "TLC555ID" SOIC127P600X175-8N 348.057,170.707 r0 top
IC20A "FIN1101K8X" SOP50P310X90-8N 236.341,219.743 r0 top (schematic designator IC20)
IC20B "FIN1101K8X" SOP50P310X90-8N 236.306,224.767 r0 top (schematic designator IC20)
IC20C "FIN1101K8X" SOP50P310X90-8N 230.781,227.117 r0 top (schematic designator IC20)
IC20D "FIN1101K8X" SOP50P310X90-8N 236.316,229.617 r0 top (schematic designator IC20)
IC20E "FIN1101K8X" SOP50P310X90-8N 230.716,222.292 r0 top (schematic designator IC20)
IC20F "FIN1101K8X" SOP50P310X90-8N 231.624,179.324 r180 top (schematic designator IC20)
IC20G "FIN1101K8X" SOP50P310X90-8N 236.466,180.442 r0 top (schematic designator IC20)
IC20H "FIN1101K8X" SOP50P310X90-8N 231.624,184.324 r180 top (schematic designator IC20)
IC20I "FIN1101K8X" SOP50P310X90-8N 236.501,185.835 r0 top (schematic designator IC20)
IC20J "FIN1101K8X" SOP50P310X90-8N 236.473,190.968 r0 top (schematic designator IC20)
IC20K "FIN1101K8X" SOP50P310X90-8N 230.976,188.443 r0 top (schematic designator IC20)
IC20L "FIN1101K8X" SOP50P310X90-8N 230.781,232.117 r0 top (schematic designator IC20)
IC20M "FIN1101K8X" SOP50P310X90-8N 230.781,237.124 r0 top (schematic designator IC20)
IC20N "FIN1101K8X" SOP50P310X90-8N 236.316,239.617 r0 top (schematic designator IC20)
IC20O "FIN1101K8X" SOP50P310X90-8N 230.781,242.117 r0 top (schematic designator IC20)
IC20P "FIN1101K8X" SOP50P310X90-8N 236.316,234.617 r0 top (schematic designator IC20)
IC20Q "FIN1101K8X" SOP50P310X90-8N 230.941,193.442 r0 top (schematic designator IC20)
IC20R "FIN1101K8X" SOP50P310X90-8N 230.976,198.425 r0 top (schematic designator IC20)
IC20S "FIN1101K8X" SOP50P310X90-8N 236.551,201.008 r0 top (schematic designator IC20)
IC20T "FIN1101K8X" SOP50P310X90-8N 230.941,203.416 r0 top (schematic designator IC20)
IC20U "FIN1101K8X" SOP50P310X90-8N 236.551,196.042 r0 top (schematic designator IC20)
IC24 "24AA02E48T-I/OT" SOT95P280X145-5N 372.843,176.133 r180 bottom
IC26 "24AA02E48T-I/OT" SOT95P280X145-5N 359.792,177.006 r180 bottom
IC27 "TPS62175DQC" SON50P200X300X80-11N-R94X250 305.49,170.015 r180 top
J1 "N10226-5212PC" 3M_N10226-5212PC 194,189.619 r90 top
J2 "N10226-5212PC" 3M_N10226-5212PC 194.006,231.524 r90 top
J3 "N2530-6002RB" 3M_N2530-6002RB 352.28,203.412 r270 top locked
J4 "10052825-101LF" AMPHENOL_10052825-101LF 403.482,168.657 r90 top locked
J5 "10052838-101LF" AMPHENOL_10052838-101LF 403.481,247.658 r90 top locked
J14 "N2530-6002RB" 3M_N2530-6002RB 389.845,203.413 r270 top locked
J24 "N2530-6002RB" 3M_N2530-6002RB 371.075,203.412 r270 top locked
L2 "10uH" IND_MURATA-PS_8400 301.007,167.057 r270 top
LD1 "Green" LED_KINGBRIGHT_KP-1608CGCK 380.407,181.602 r90 top
LD5 "Green" LED_KINGBRIGHT_KP-1608CGCK 311.532,174.632 r270 top
LD6 "Green" LED_KINGBRIGHT_KP-1608CGCK 297.585,174.772 r270 top
LD7 "Green" LED_KINGBRIGHT_KP-1608CGCK 338.467,181.9 r0 top
LD8 "Green" LED_KINGBRIGHT_KP-1608CGCK 359.437,181.447 r0 top
M3 "Plated Hole" MTG300_600 196.889,164.579 r0 top
M4 "Plated Hole" MTG300_600 196.875,253.467 r0 top
R1 "10k" RESC1005X40N 311.532,171.932 r270 top
R2 "470" RESC1005X40N 297.585,171.932 r90 top
R3 "470" RESC1005X40N 341.306,181.886 r180 top
R4 "470" RESC1005X40N 362.345,181.416 r180 top
R5 "1M1" RESC2012X60N 202.23,252.634 r0 bottom
R6 "10M" RESC2113X55N 263.434,162.916 r0 bottom
R7 "470" RESC1005X40N 378.557,182.402 r0 top
R8 "100" RESC1005X40N 227.543,242.333 r270 top
R9 "100" RESC1005X40N 236.566,178.147 r180 top
R10 "33" RESC1608X55N 375.032,175.182 r180 top
R11 "33" RESC1608X55N 364.907,173.057 r90 bottom
R12 "0" RESC1005X40N 394.448,219.41 r0 bottom
R13 "0" RESC1005X40N 394.448,220.41 r0 bottom
R14 "0" RESC1005X40N 394.473,217.899 r0 bottom
R15 "0" RESC1005X40N 394.473,216.895 r0 bottom
R16 "0" RESC1005X40N 394.473,212.784 r0 bottom
R17 "0" RESC1005X40N 394.473,211.791 r0 bottom
R18 "0" RESC1005X40N 394.473,210.26 r0 bottom
R19 "0" RESC1005X40N 394.473,209.267 r0 bottom
R20 "0" RESC1005X40N 394.493,206.732 r0 bottom
R21 "0" RESC1005X40N 394.493,207.717 r0 bottom
R22 "0" RESC1005X40N 394.473,202.635 r0 bottom
R23 "0" RESC1005X40N 394.473,201.635 r0 bottom
R24 "0" RESC1005X40N 394.473,197.56 r0 bottom
R25 "0" RESC1005X40N 394.473,196.56 r0 bottom
R26 "0" RESC1005X40N 394.473,195.021 r0 bottom
R27 "0" RESC1005X40N 394.473,194.01 r0 bottom
R28 "0" RESC1005X40N 375.668,220.42 r0 bottom
R29 "0" RESC1005X40N 375.668,219.42 r0 bottom
R30 "0" RESC1005X40N 375.715,217.877 r0 bottom
R31 "0" RESC1005X40N 375.69,216.877 r0 bottom
R32 "0" RESC1005X40N 375.657,212.789 r0 bottom
R33 "0" RESC1005X40N 375.665,211.768 r0 bottom
R34 "0" RESC1005X40N 375.648,210.184 r0 bottom
R35 "0" RESC1005X40N 375.644,209.216 r0 bottom
R36 "33" RESC1005X40N 338.467,168.68 r270 top
R37 "0" RESC1005X40N 375.682,205.235 r0 bottom
R38 "0" RESC1005X40N 375.682,204.157 r0 bottom
R39 "33" RESC1608X55N 378.907,175.907 r180 top
R40 "0" RESC1005X40N 375.69,202.638 r0 bottom
R41 "0" RESC1005X40N 375.69,201.619 r0 bottom
R42 "0" RESC1005X40N 375.715,199.098 r0 bottom
R43 "0" RESC1005X40N 375.715,200.105 r0 bottom
R44 "0" RESC1005X40N 375.669,194.943 r0 bottom
R45 "0" RESC1005X40N 375.668,193.945 r0 bottom
R46 "33" RESC1005X40N 374.957,168.457 r0 top
R47 "0" RESC1005X40N 308.503,173.295 r90 top
R48 "200" RESC1005X40N 374.968,169.649 r180 top
R49 "10M" RESC2113X55N 232.738,162.725 r180 top
R50 "10k" RESC1005X40N 362.607,176.301 r180 top
R51 "10k" RESC1005X40N 362.607,171.632 r0 top
R52 "10k" RESC1005X40N 374.957,171.85 r0 top
R53 "10k" RESC1005X40N 374.957,173.057 r0 top
R54 "10k" RESC1005X40N 362.607,173.189 r0 top
R55 "2k7" RESC1608X55N 362.607,177.857 r0 top
R56 "0" RESC1005X35N 315.632,168.032 r0 top
R57 "0" RESC1005X35N 315.632,168.932 r0 top
R58 "0" RESC1005X35N 315.632,169.838 r0 top
R59 "0" RESC1005X35N 315.633,170.741 r0 top
R60 "10k" RESC1005X40N 375.032,176.682 r180 top
R61 "0" RESC1005X35N 345.907,164.707 r0 top
R62 "2k7" RESC1608X55N 353.456,173.106 r180 top
R63 "0" RESC1005X35N 342.286,167.532 r180 top
R64 "10k" RESC1005X40N 359.032,169.707 r0 top
R65 "10k" RESC1005X40N 302.507,171.957 r0 top
R66 "10k" RESC1005X40N 323.807,177.991 r0 top
R67 "0" RESC1005X35N 323.807,176.73 r180 top
R68 "0" RESC1005X35N 327.1,181.318 r180 top
R71 "10k" RESC1005X40N 341.306,175.231 r180 top
R121 "270k" RESC1608X55N 305.732,174.207 r180 top
R122 "82k" RESC1608X55N 305.732,172.499 r0 top
R131A "100" RESC1005X40N 236.236,221.543 r0 top (schematic designator R131)
R131B "100" RESC1005X40N 236.201,226.567 r0 top (schematic designator R131)
R131C "100" RESC1005X40N 230.676,228.917 r0 top (schematic designator R131)
R131D "100" RESC1005X40N 236.211,231.417 r0 top (schematic designator R131)
R131E "100" RESC1005X40N 230.611,224.092 r0 top (schematic designator R131)
R131F "100" RESC1005X40N 231.729,177.524 r180 top (schematic designator R131)
R131G "100" RESC1005X40N 236.361,182.242 r0 top (schematic designator R131)
R131H "100" RESC1005X40N 231.729,182.524 r180 top (schematic designator R131)
R131I "100" RESC1005X40N 236.396,187.635 r0 top (schematic designator R131)
R131J "100" RESC1005X40N 236.368,192.768 r0 top (schematic designator R131)
R131K "100" RESC1005X40N 230.871,190.243 r0 top (schematic designator R131)
R131L "100" RESC1005X40N 230.676,233.917 r0 top (schematic designator R131)
R131M "100" RESC1005X40N 230.676,238.924 r0 top (schematic designator R131)
R131N "100" RESC1005X40N 236.211,241.417 r0 top (schematic designator R131)
R131O "100" RESC1005X40N 230.676,243.917 r0 top (schematic designator R131)
R131P "100" RESC1005X40N 236.211,236.417 r0 top (schematic designator R131)
R131Q "100" RESC1005X40N 230.836,195.242 r0 top (schematic designator R131)
R131R "100" RESC1005X40N 230.871,200.225 r0 top (schematic designator R131)
R131S "100" RESC1005X40N 236.446,202.808 r0 top (schematic designator R131)
R131T "100" RESC1005X40N 230.836,205.216 r0 top (schematic designator R131)
R131U "100" RESC1005X40N 236.448,197.771 r0 top (schematic designator R131)
SCREW1 "3341-31" 3M_3341-31 178.666,174.14 r180 top
SCREW2 "3341-31" 3M_3341-31 178.592,205.296 r180 top
SCREW3 "3341-31" 3M_3341-31 178.592,216.057 r180 top
SCREW4 "3341-31" 3M_3341-31 178.74,247.459 r180 top
T1 "BSS138LT1G" SOT95P240X110-3N 378.567,168.461 r90 top
T2 "BSS138LT1G" SOT95P240X110-3N 348.157,165.857 r270 top
T3 "BSS138LT1G" SOT95P240X110-3N 357.607,172.532 r90 top
T4 "BSS138LT1G" SOT95P240X110-3N 357.707,166.707 r90 top

## Footprints (in the part's own frame and the unit in brackets; to place one, negate y for a bottom-side part, rotate by r counter-clockwise, add the part's x,y. Pads: shape width x height; smd on the part's side, far side on the other; paste and mask are expansions set on the pad)
3M_3341-31 [mm] "MDR Female Screw Locks : Thread Length= 3.8mm, Thread Size: M2.5"
  silkscreen extent -4.04,-2.74 5.26,2.74, body extent -9.01,-2.74 5.26,2.74, height 2.37
3M_N2530-6002RB [mm] "30 Contacts - Straight .100\" x .100\" Low Profile Four-Wall Header"
  round 1.6 hole 1: 1(-17.78,-1.27) 2(-17.78,1.27) 3(-15.24,-1.27) 4(-15.24,1.27) 5(-12.7,-1.27) 6(-12.7,1.27) 7(-10.16,-1.27) 8(-10.16,1.27) 9(-7.62,-1.27) 10(-7.62,1.27) 11(-5.08,-1.27) 12(-5.08,1.27) 13(-2.54,-1.27) 14(-2.54,1.27) 15(0,-1.27) 16(0,1.27) 17(2.54,-1.27) 18(2.54,1.27) 19(5.08,-1.27) 20(5.08,1.27) 21(7.62,-1.27) 22(7.62,1.27) 23(10.16,-1.27) 24(10.16,1.27) 25(12.7,-1.27) 26(12.7,1.27) 27(15.24,-1.27) 28(15.24,1.27) 29(17.78,-1.27) 30(17.78,1.27)
  silkscreen extent -22.71,-4.85 22.71,4.52, body extent -22.71,-4.11 22.71,4.52, height 9.91
3M_N10226-5212PC [mm] "26 contacts, Mini D Ribbon (MDR), 102 Series, .050\" Boardmount Through-hole Right Angle Receptacle-Shielded"
  round 1.4 hole 0.8: 1(-7.62,-4.826) 2(-6.35,-2.921) 3(-5.08,-4.826) 4(-3.81,-2.921) 5(-2.54,-4.826) 6(-1.27,-2.921) 7(0,-4.826) 8(1.27,-2.921) 9(2.54,-4.826) 10(3.81,-2.921) 11(5.08,-4.826) 12(6.35,-2.921) 13(7.62,-4.826) 14(-7.62,-1.016) 15(-6.35,0.889) 16(-5.08,-1.016) 17(-3.81,0.889) 18(-2.54,-1.016) 19(-1.27,0.889) 20(0,-1.016) 21(1.27,0.889) 22(2.54,-1.016) 23(3.81,0.889) 24(5.08,-1.016) 25(6.35,0.889) 26(7.62,-1.016)
  round 5.5 hole 2.8: 27(-15.621,-2.921) 28(15.621,-2.921)
  silkscreen extent -18.54,-6.5 18.54,11.05, body extent -18.54,-5.71 18.54,11.05, height 9.4
AMPHENOL_10052825-101LF [mm] "72 Contacts, 2mm Pitch, 6 Columns, 4 Pairs per Column, 4 Walls, Right Angle Header"
  round 1.1 hole 0.5: A1(-5,-7.65) A2(-3,-7.75) A3(-1,-7.65) A4(1,-7.75) A5(3,-7.65) A6(5,-7.75) B1(-5,-6.25) B2(-3,-6.35) B3(-1,-6.25) B4(1,-6.35) B5(3,-6.25) B6(5,-6.35) C1(-5,-4.85) C2(-3,-4.95) C3(-1,-4.85) C4(1,-4.95) C5(3,-4.85) C6(5,-4.95) D1(-5,-3.45) D2(-3,-3.55) D3(-1,-3.45) D4(1,-3.55) D5(3,-3.45) D6(5,-3.55) E1(-5,-2.05) E2(-3,-2.15) E3(-1,-2.05) E4(1,-2.15) E5(3,-2.05) E6(5,-2.15) F1(-5,-0.65) F2(-3,-0.75) F3(-1,-0.65) F4(1,-0.75) F5(3,-0.65) F6(5,-0.75) G1(-5,0.75) G2(-3,0.65) G3(-1,0.75) G4(1,0.65) G5(3,0.75) G6(5,0.65) H1(-5,2.15) H2(-3,2.05) H3(-1,2.15) H4(1,2.05) H5(3,2.15) H6(5,2.05) I1(-5,3.55) I2(-3,3.45) I3(-1,3.55) I4(1,3.45) I5(3,3.55) I6(5,3.45) J1(-5,4.95) J2(-3,4.85) J3(-1,4.95) J4(1,4.85) J5(3,4.95) J6(5,4.85) K1(-5,6.35) K2(-3,6.25) K3(-1,6.35) K4(1,6.25) K5(3,6.35) K6(5,6.25) L1(-5,7.75) L2(-3,7.65) L3(-1,7.75) L4(1,7.65) L5(3,7.75) L6(5,7.65)
  silkscreen extent -6.95,-21.95 6.95,11.85, body extent -6.95,-21.95 6.95,11.85, height 15.25
AMPHENOL_10052838-101LF [mm] "96 Contacts, 2mm Pitch, 8 Columns, 4 Pairs per Column, 4 Walls, Right Angle Header"
  round 1.1 hole 0.5: A1(-7,-7.65) A2(-5,-7.75) A3(-3,-7.65) A4(-1,-7.75) A5(1,-7.65) A6(3,-7.75) A7(5,-7.65) A8(7,-7.75) B1(-7,-6.25) B2(-5,-6.35) B3(-3,-6.25) B4(-1,-6.35) B5(1,-6.25) B6(3,-6.35) B7(5,-6.25) B8(7,-6.35) C1(-7,-4.85) C2(-5,-4.95) C3(-3,-4.85) C4(-1,-4.95) C5(1,-4.85) C6(3,-4.95) C7(5,-4.85) C8(7,-4.95) D1(-7,-3.45) D2(-5,-3.55) D3(-3,-3.45) D4(-1,-3.55) D5(1,-3.45) D6(3,-3.55) D7(5,-3.45) D8(7,-3.55) E1(-7,-2.05) E2(-5,-2.15) E3(-3,-2.05) E4(-1,-2.15) E5(1,-2.05) E6(3,-2.15) E7(5,-2.05) E8(7,-2.15) F1(-7,-0.65) F2(-5,-0.75) F3(-3,-0.65) F4(-1,-0.75) F5(1,-0.65) F6(3,-0.75) F7(5,-0.65) F8(7,-0.75) G1(-7,0.75) G2(-5,0.65) G3(-3,0.75) G4(-1,0.65) G5(1,0.75) G6(3,0.65) G7(5,0.75) G8(7,0.65) H1(-7,2.15) H2(-5,2.05) H3(-3,2.15) H4(-1,2.05) H5(1,2.15) H6(3,2.05) H7(5,2.15) H8(7,2.05) I1(-7,3.55) I2(-5,3.45) I3(-3,3.55) I4(-1,3.45) I5(1,3.55) I6(3,3.45) I7(5,3.55) I8(7,3.45) J1(-7,4.95) J2(-5,4.85) J3(-3,4.95) J4(-1,4.85) J5(1,4.95) J6(3,4.85) J7(5,4.95) J8(7,4.85) K1(-7,6.35) K2(-5,6.25) K3(-3,6.35) K4(-1,6.25) K5(1,6.35) K6(3,6.25) K7(5,6.35) K8(7,6.25) L1(-7,7.75) L2(-5,7.65) L3(-3,7.75) L4(-1,7.65) L5(1,7.75) L6(3,7.65) L7(5,7.75) L8(7,7.65)
  silkscreen extent -8.95,-21.95 8.95,11.85, body extent -8.95,-21.95 8.95,11.85, height 15.25
c100h50 [mm] "Plated Through Hole: Hole Dia.=0.5mm Pad Dia.=1.0mm"
  round 1 hole 0.5: 1(0,0)
CAPAE430X540N [mm] "Capacitor, Aluminium Electrolytric, 4.3mm L X 4.3mm W X 5.4mm H, IPC Medium Density"
  rect 2.55x1.6 smd: 1(-1.75,0) 2(1.75,0)
  silkscreen extent -2.8,-2.15 2.15,2.15, body extent -2.75,-2.25 2.75,2.25, height 5.7
CAPC1005X55N [mm] "Capacitor, Non-Polarized, Chip; 1.00mm L X 0.50mm W X 0.70mm H, IPC Medium Density"
  rect 0.62x0.62 smd: 1(-0.45,0) 2(0.45,0)
  body extent -0.52,-0.27 0.53,0.28, height 0.55
CAPC1608X87N [mm] "Chip Capacitor, Body 1.6x0.8mm IPC Medium Density"
  rect 0.95x1 smd: 1(-0.8,0) 2(0.8,0)
  body extent -0.87,-0.47 0.88,0.48, height 0.87
CAPC1608X90N [mm] "Chip Capacitor, Body 1.6x0.8mm IPC Medium Density"
  rect 0.95x0.95 smd: 1(-0.75,0) 2(0.75,0)
  body extent -0.85,-0.45 0.85,0.45, height 0.9
CAPC2012X135N [mm] "Chip Capacitor, Body 2.0x1.25mm, IPC Medium Density"
  rect 1.05x1.4 smd: 1(-0.9,0) 2(0.9,0)
  silkscreen extent 0,-0.58 0,0.58, body extent -1.05,-0.67 1.05,0.68, height 1.25
FIDUCIAL_TOP_C100-200 [mm] "Round Fiducial Target, Top Layer, 1.0mm, Top Solder 2.0mm, Keepout =2.0mm"
  round 1 smd paste-0.51 mask+0.5: FTG2(0,0)
  TopLayer keep-out circle w0.1: c0,0 r1
FIDUCIAL_TOP_S100-200 [mm] "Square Fiducial Target, Top Layer, 1.0mm, Top Solder 2.0mm, Keepout =2.0mm"
  rect 1x1 smd rot 45 paste-0.51 mask+0.5: 1(0,0)
  TopLayer keep-out region: 1.414,0 0,-1.414 -1.414,0 0,1.414
FIDUCIAL_TOP_S200-400 [mm] "Square Fiducial Target, Top Layer, 2.0mm, Top Solder 4.0mm, Keepout =4.0mm"
  rect 2x2 smd rot 45 paste-0.9 mask+1: 1(0,0)
  TopLayer keep-out region: -2.839,0.011 -0.011,2.839 2.818,0.011 -0.011,-2.818
IND_MURATA-PS_8400 [mm] "Miniature Surface Mount Power Inductors, 4.5mm L X 3.3mm W X 2.9mm H, MURATA 8400 Series"
  rect 2x3.5 smd: 1(-1.6,0) 2(1.6,0)
  silkscreen extent -0.3,-1.8 0.3,1.8, body extent -2.4,-1.8 2.4,1.8, height 2.9
LED_KINGBRIGHT_KP-1608CGCK [mm] "SMT Green LED, Case 0603, Body L 1.60mm x W 0.80mm x H 1.10mm"
  rect 0.8x0.8 smd: 1(-0.825,0) 2(0.825,0)
  silkscreen extent -2.01,-0.52 0.08,0.4, body extent -0.8,-0.4 0.8,0.4, height 1.1
MTG300_600 [mm] "Plated Through Hole: Hole Dia.=3.0mm Pad Dia.=6.0mm"
  round 6 hole 3: 1(0,0)
RESC1005X35N [mm] "Chip Resistor, EIA 0402, Metric 1005, Body 1.0x0.5mm, IPC Medium Density"
  rect 0.58x0.62 smd: 1(-0.47,0) 2(0.47,0)
  body extent -0.52,-0.27 0.53,0.28, height 0.35
RESC1005X40N [mm] "Chip Resistor, EIA 0402, Metric 1005, Body 1.0x0.5mm, IPC Medium Density"
  rect 0.58x0.62 smd: 1(-0.47,0) 2(0.47,0)
  body extent -0.52,-0.27 0.53,0.28, height 0.4
RESC1608X55N [mm] "Chip Resistor, EIA 0603, Metric 1608, Body 1.6x0.8mm, IPC Medium Density"
  rect 0.9x1 smd: 1(-0.8,0) 2(0.8,0)
  body extent -0.87,-0.47 0.88,0.48, height 0.55
RESC2012X60N [mm] "Chip Resistor, EIA 0805, Metric 2012, Body 2.0x1.2mm, IPC Medium Density"
  rect 0.95x1.4 smd: 1(-1,0) 2(1,0)
  silkscreen extent 0,-0.55 0,0.55, body extent -1.1,-0.67 1.1,0.68, height 0.6
RESC2113X55N [mm] "Chip Resistor, EIA 0805, Metric 2113, Body 2.05x1.3mm, IPC Medium Density"
  rect 1x1.45 smd: 1(-0.95,0) 2(0.95,0)
  silkscreen extent 0,-0.55 0,0.55, body extent -1,-0.62 1,0.63, height 0.55
SOD2512X110N [mm] "Small Outline Diode (SOD-323), 1.70mm W X 1.25mm L X 1.10mm H body,  IPC Medium Density"
  rect 0.9x0.5 smd: 1(-1.3,0) 2(1.3,0)
  silkscreen extent -1.62,-0.65 0.85,0.88, body extent -1.35,-0.67 1.35,0.68, height 1.1
SOIC127P600X175-8N [mm] "SOIC 8, Pitch 1.27mm - Body 4x5mm, IPC Medium Density"
  rect 1.55x0.6 smd: 1(-2.7,1.905) 2(-2.7,0.635) 3(-2.7,-0.635) 4(-2.7,-1.905) 5(2.7,-1.905) 6(2.7,-0.635) 7(2.7,0.635) 8(2.7,1.905)
  silkscreen extent -2.52,-2.5 1.55,2.88, body extent -3.1,-2.5 3.1,2.5, height 1.75
SON50P200X300X80-11N-R94X250 [mm] "SON, 10-Leads, Body 2x3mm, Pitch 0.5mm, Thermal Pad 0.94x2.5mm, IPC Medium Density"
  rect 0.7x0.3 smd: 1(-1.05,1) 2(-1.05,0.5) 3(-1.05,0) 4(-1.05,-0.5) 5(-1.05,-1) 6(1.05,-1) 7(1.05,-0.5) 8(1.05,0) 9(1.05,0.5) 10(1.05,1)
  rect 0.94x2.5 smd: 11(0,0)
  silkscreen extent -1.5,-1.55 1.05,1.6, body extent -1.05,-1.55 1.05,1.55, height 0.8
SOP50P310X90-8N [mm] "SOP, 0.50mm pitch; 8 pin, 2.30mm W X 2.00mm L X 0.90mm H body, PC Medium Density"
  rect 0.85x0.3 smd: 1(-1.55,0.75) 2(-1.55,0.25) 3(-1.55,-0.25) 4(-1.55,-0.75) 5(1.55,-0.75) 6(1.55,-0.25) 7(1.55,0.25) 8(1.55,0.75)
  silkscreen extent -1.82,-1 0.8,1.52, body extent -1.62,-1 1.62,1, height 0.9
SOP65P490X109-8N [mm] "SOP, 0.65mm pitch; 8 pin,3.00mm W X 3.00mm L X 1.09mm H bodyI, PC Medium Density"
  rect 1.5x0.45 smd: 1(-2.2,0.975) 2(-2.2,0.325) 3(-2.2,-0.325) 4(-2.2,-0.975) 5(2.2,-0.975) 6(2.2,-0.325) 7(2.2,0.325) 8(2.2,0.975)
  silkscreen extent -2.82,-1.5 1.12,1.82, body extent -2.45,-1.55 2.45,1.55, height 1.09
SOP65P640X110-14N [mm] "SOP, 14-Leads, Body 4.4x5mm (max), Pitch 0.65mm, IPC Medium Density"
  rect 1.45x0.45 smd: 1(-2.9,1.95) 2(-2.9,1.3) 3(-2.9,0.65) 4(-2.9,0) 5(-2.9,-0.65) 6(-2.9,-1.3) 7(-2.9,-1.95) 8(2.9,-1.95) 9(2.9,-1.3) 10(2.9,-0.65) 11(2.9,0) 12(2.9,0.65) 13(2.9,1.3) 14(2.9,1.95)
  silkscreen extent -3.48,-2.5 1.85,2.82, body extent -3.12,-2.55 3.12,2.55, height 1.1
SOT65P210X110-6N [mm] "SOT363, SC70-6, SOT, 0.65mm Pitch, 6 Pin, 1.25mm W X 2.00mm L X 1.10mm H, IPC Medium Density"
  rect 0.95x0.4 smd: 1(-1.1,0.65) 2(-1.1,0) 3(-1.1,-0.65) 4(1.1,-0.65) 5(1.1,0) 6(1.1,0.65)
  silkscreen extent -1.42,-1 0.3,1.48, body extent -1.2,-1.1 1.2,1.1, height 1.1
SOT95P240X110-3N [mm] "SOT23 3-Leads, Pitch 0.95mm, Body 1.3x2.9mm, IPC Medium Density"
  rect 1.05x0.65 smd: 1(-1.15,0.95) 2(-1.15,-0.95) 3(1.15,0)
  silkscreen extent -1.52,-1.45 0.3,1.92, body extent -1.25,-1.5 1.25,1.5, height 1.1
SOT95P280X145-5N [mm] "SOT, 0.95mm pitch; 5 pin, 1.60mm W X 2.90mm L X 1.45mm H body, IPC Medium Density"
  rect 1.1x0.6 smd: 1(-1.3,0.95) 2(-1.3,0) 3(-1.3,-0.95) 4(1.3,-0.95) 5(1.3,0.95)
  silkscreen extent -2.52,-1.45 0.43,1.68, body extent -1.4,-1.5 1.4,1.5, height 1.45
SOT190P230X110-4N [mm] "SOT143, SOT, 1.90mm Pitch; 4 Pin, 1.30mm W X 2.90mm L X 1.10mm H body, IPC Medium Density"
  rect 1x1 smd: 1(-1.15,0.75)
  rect 1x0.6 smd: 2(-1.15,-0.95) 3(1.15,-0.95) 4(1.15,0.95)
  silkscreen extent -1.52,-1.45 0.33,1.88, body extent -1.25,-1.5 1.25,1.5, height 1.1
SOTFL50P160X60-6N [mm] "SOTFL (SOT666), 0.50mm, Pitch; 6 Pin, 1.20mm W X 1.60mm L X 0.60mm H Body, IPC Medium Density"
  rect 0.57x0.3 smd: 1(-0.79,0.5) 2(-0.79,0) 3(-0.79,-0.5) 4(0.79,-0.5) 5(0.79,0) 6(0.79,0.5)
  silkscreen extent -1.22,-0.8 0,1.27, body extent -0.85,-0.85 0.85,0.85, height 0.6